# Altium PCB Hub-UV17.PcbDoc
Units mm, origin at the board's own origin, x right, y up, seen from the top; angles counter-clockwise.
Board outline 105 x 70 mm, 4 copper layers (Top Layer, Internal Plane 1, Signal Layer 1, Bottom Layer), stack 0.778 mm thick; 113 components, 152 nets, 765 pads, 115 vias.
Unrouted connection lines stored in the file: 410.
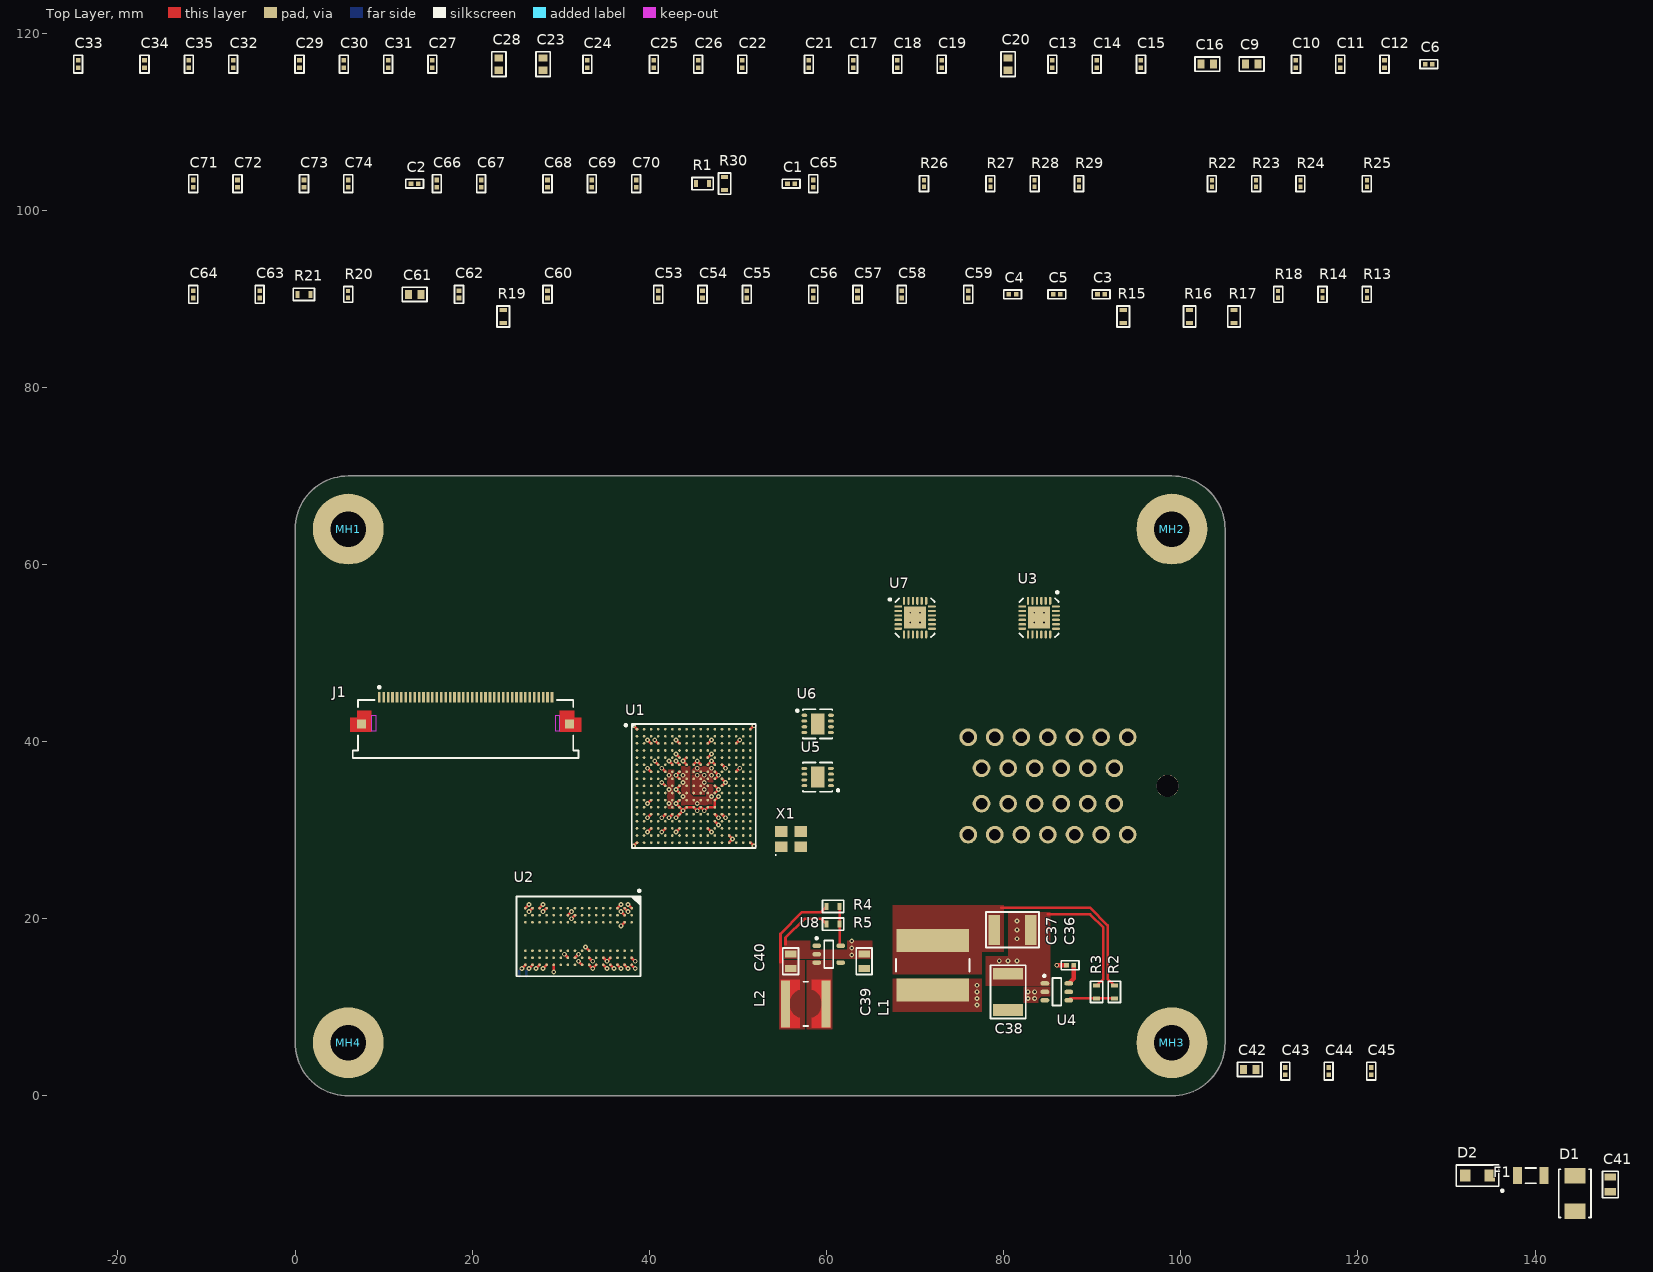
[diagram p0: Top Layer view]
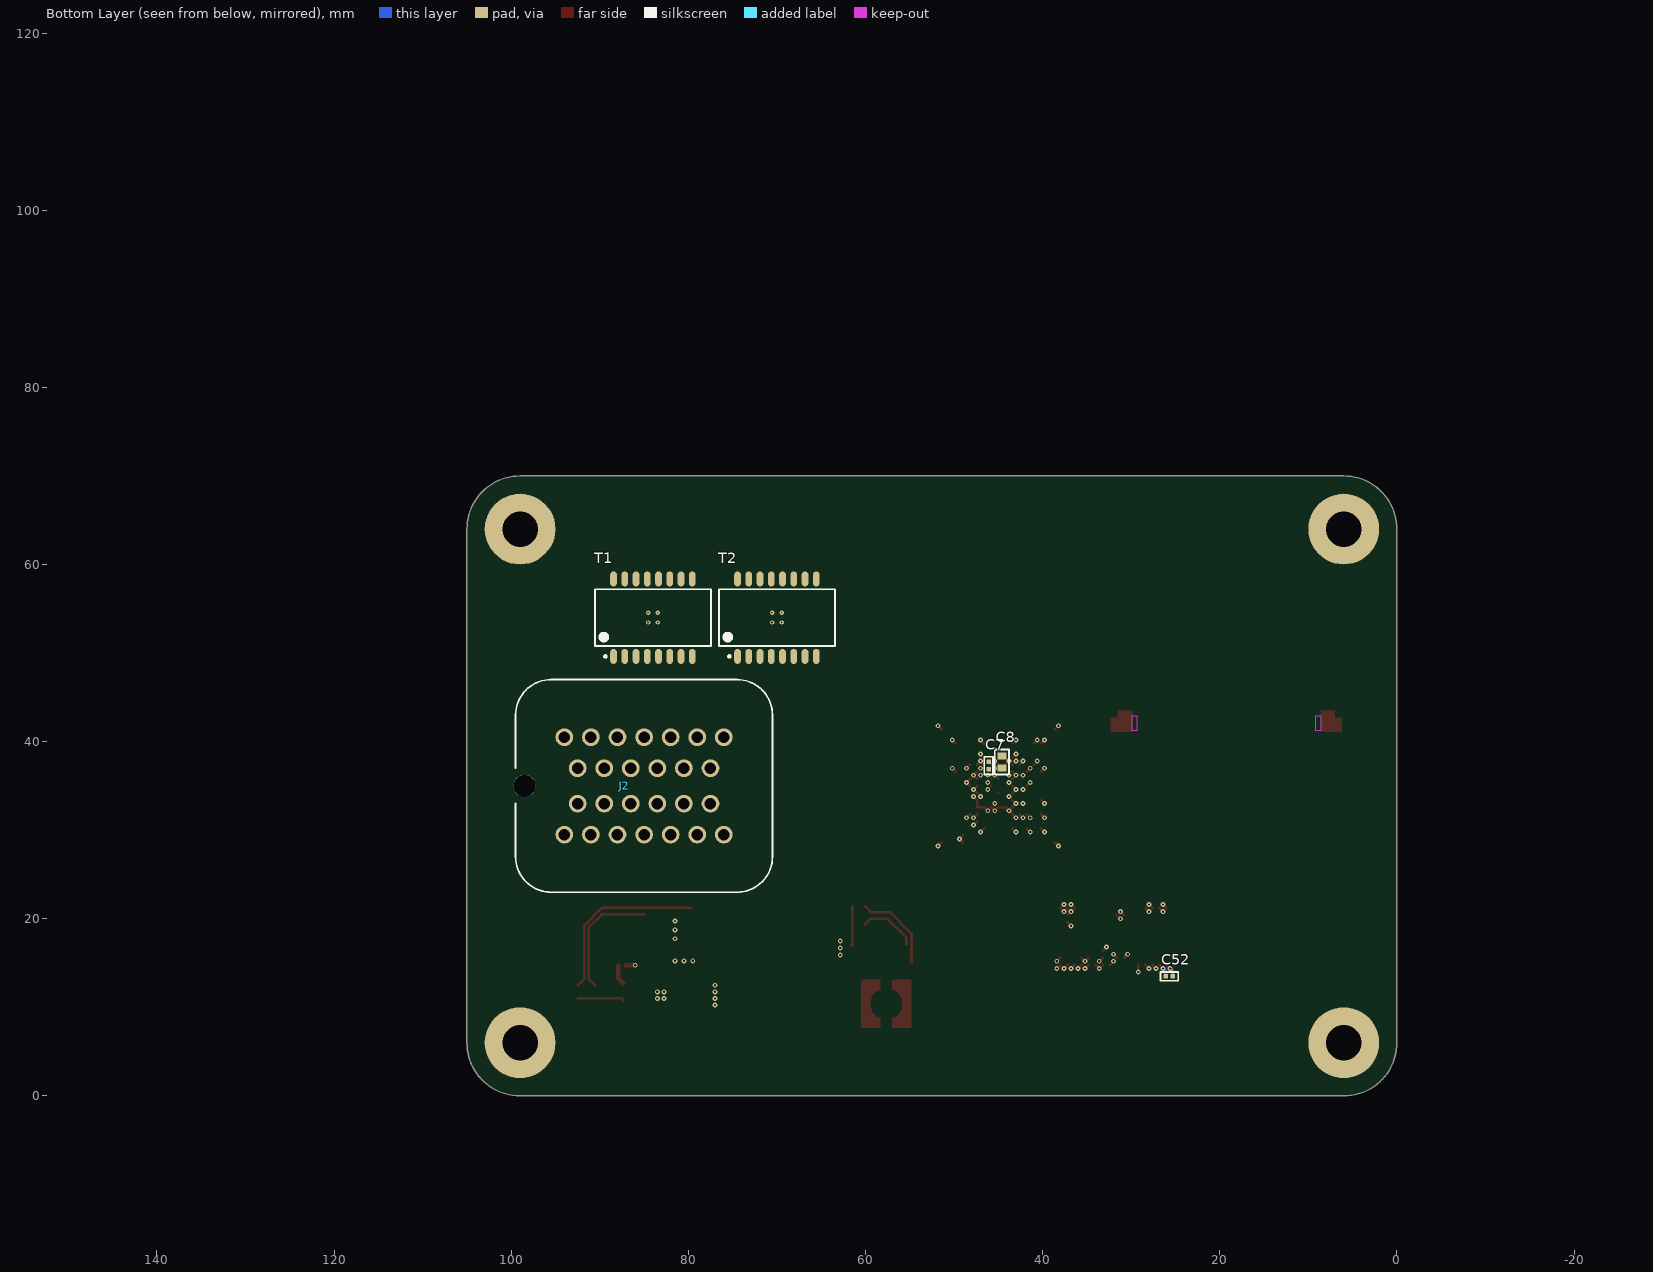
[diagram p1: Bottom Layer view, seen from below]
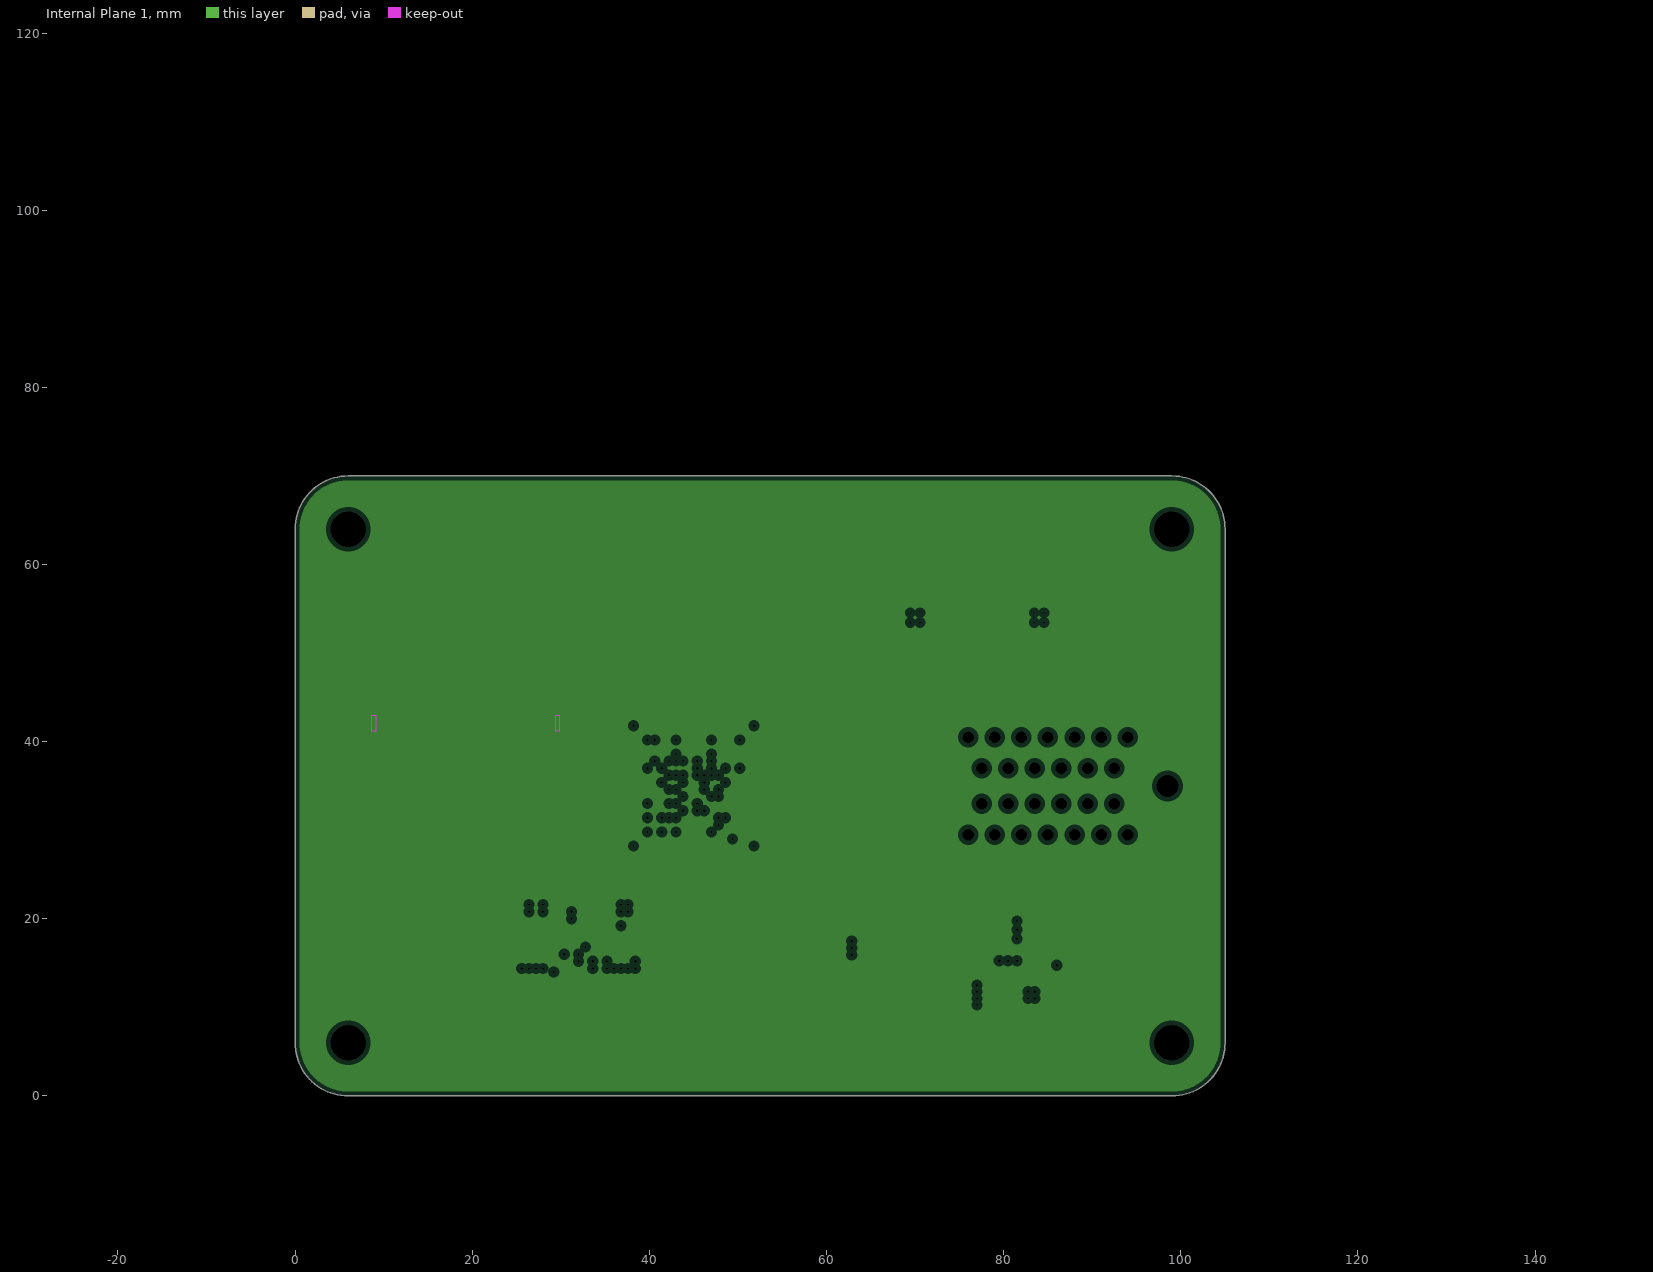
[diagram p2: Internal Plane 1, clearances drawn from the general rule]
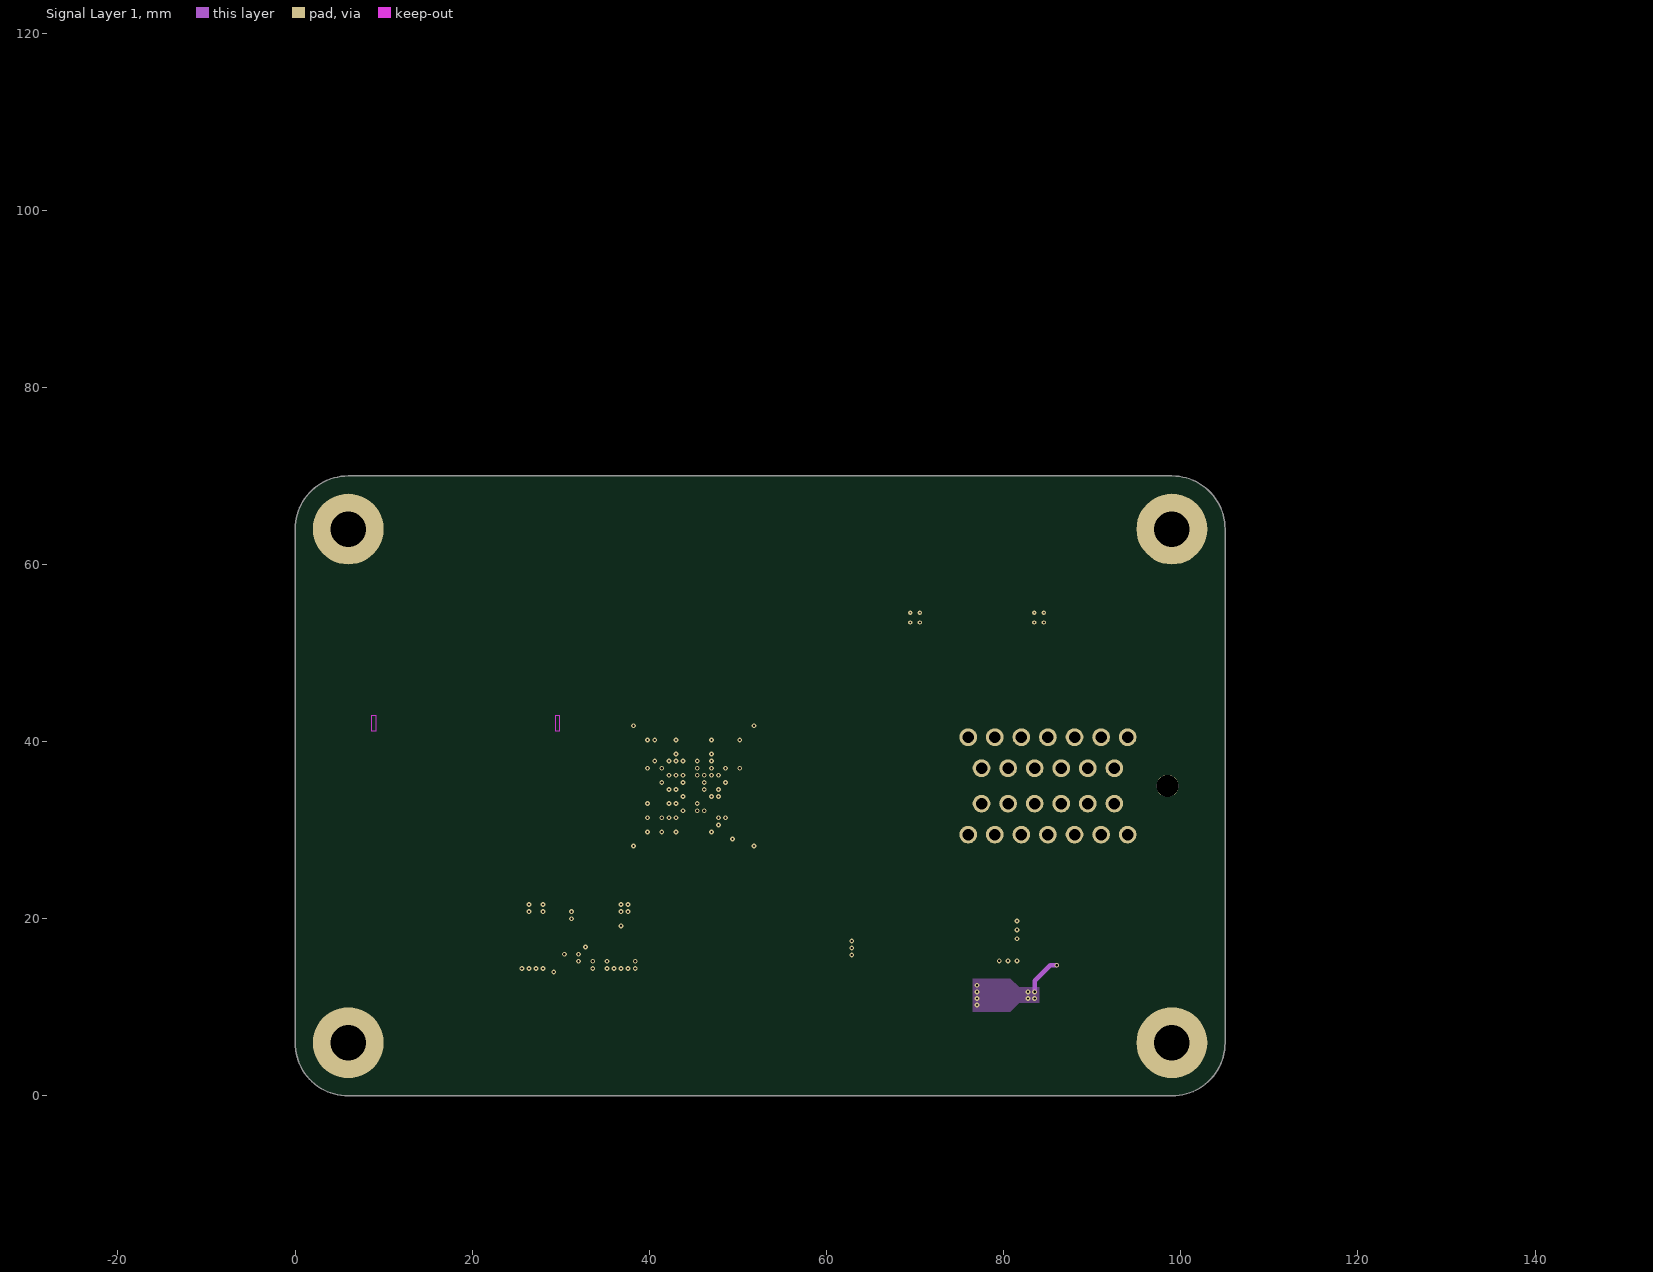
[diagram p3: Signal Layer 1]

## Layer stack, top to bottom
Top Solder: solder mask 0.0102, Solder Resist, Dk 3.5
Top Layer: signal copper 0.0356
Dielectric 1: core 0.254, FR-4, Dk 4.2
Internal Plane 1: plane copper 0.036
Dielectric 3: core 0.254, Dk 4.2
Signal Layer 1: signal copper 0.036
Dielectric 4: prepreg 0.127, Dk 4.2
Bottom Layer: signal copper 0.0356
Bottom Solder: solder mask 0.0102, Solder Resist, Dk 3.5

## Board outline
0,6 ccw(c6,6) 6,0 99,0 ccw(c99,6) 105,6 105,64 ccw(c99,64) 99,70 6,70 ccw(c6,64) 0,64

## Design rules (kind name [scope] priority, off if disabled: settings)
Clearance "Keep Out Clearance" [All vs OnLayer('Keep-Out Layer')] p1: gap=0 ignorepadtopadclearanceinfootprint=TRUE
Clearance [All] p2: gap=0.127 ignorepadtopadclearanceinfootprint=FALSE
DiffPairsRouting [All] p1: maxlimit=0.254 minlimit=0.254 mostfreqgap=0.254 toplayer_minwidth=0.381 toplayer_maxwidth=0.381 toplayer_prefwidth=0.381 midlayer1_minwidth=0.381 midlayer1_maxwidth=0.381 midlayer1_prefwidth=0.381 bottomlayer_minwidth=0.381 bottomlayer_maxwidth=0.381 bottomlayer_prefwidth=0.381 maxuncoupledlength=12.7
PlaneClearance [All] p1: clearance=0.508
PlaneConnect [All] p1: planeconnectstyle=Relief reliefexpansion=0.508 reliefentries=4 reliefconductorwidth=0.254 reliefairgap=0.254
PolygonConnect PolygonConnect_Power [All] p1: connectstyle=Direct reliefconductorwidth=0.254 reliefentries=4 polygonreliefangle="90 Angle" airgapwidth=0.254
PolygonConnect [All] p2: connectstyle=Relief reliefconductorwidth=0.254 reliefentries=4 polygonreliefangle="90 Angle" airgapwidth=0.254
RoutingVias [All] p1: holewidth=0.711 width=1.27 viastyle="Through Hole" minholewidth=0.25 minwidth=0.55 maxholewidth=0.711 maxwidth=1.27
SolderMaskExpansion [All] p1: expansion=0.102
Width [All] p1: maxlimit=2 minlimit=0.127 preferedwidth=0.2
27 further rules are at their usual default settings.

## Classes and differential pairs
net class ETH_CTRL: ETH_MDC ETH_MDIO ETH_nRST
net class UART: UART_CTS UART_RTS UART_RXD UART_TXD
component class "CPU - Communications": U5 U6
component class "CPU - Control": X1
component class "CPU - DDR3": C3 C4 C5 C42 C43 C44 C45 C52 C53 C54 C55 C56 C57 C58 C59 C60 C61 C62 C63 C64 R13 R14 R15 R16 R17 R18 R19 R20 R21 U1 U2
component class "CPU - Ethernet": C1 C2 C65 C66 C67 C68 C69 C70 C71 C72 C73 C74 R1 R22 R23 R24 R25 R26 R27 R28 R29 R30 T1 T2 U3 U7
component class "CPU - LCD": J1
component class "CPU - Power": C6 C7 C8 C9 C10 C11 C12 C13 C14 C15 C16 C17 C18 C19 C20 C21 C22 C23 C24 C25 C26 C27 C28 C29 C30 C31 C32 C33 C34 C35
component class Power: C36 C37 C38 C39 C40 C41 D1 D2 F1 L1 L2 R2 R3 R4 R5 U4 U8
net class CAN1: CAN1_RX CAN1_TX
net class CAN2: CAN2_RX CAN2_TX
net class DIFF100: DRAM_CLK_N DRAM_CLK_P DRAM_DQS0_N DRAM_DQS0_P DRAM_DQS1_N DRAM_DQS1_P
net class DRAM_ADDRCNTL: DRAM_A0 DRAM_A1 DRAM_A2 DRAM_A3 DRAM_A4 DRAM_A5 DRAM_A6 DRAM_A7 DRAM_A8 DRAM_A9 DRAM_A10 DRAM_A11 DRAM_A12 DRAM_A13 DRAM_A14 DRAM_A15 DRAM_BA0 DRAM_BA1 DRAM_BA2 DRAM_CAS DRAM_CKE0 DRAM_CKE1 DRAM_CS0 DRAM_CS1 DRAM_ODT0 DRAM_ODT1 DRAM_RAS DRAM_RST DRAM_WE
net class DRAM_BANK0: DRAM_D0 DRAM_D1 DRAM_D2 DRAM_D3 DRAM_D4 DRAM_D5 DRAM_D6 DRAM_D7 DRAM_DQM0 DRAM_DQS0_N DRAM_DQS0_P
net class DRAM_BANK1: DRAM_D8 DRAM_D9 DRAM_D10 DRAM_D11 DRAM_D12 DRAM_D13 DRAM_D14 DRAM_D15 DRAM_DQM1 DRAM_DQS1_N DRAM_DQS1_P
net class DRAM_CLK: DRAM_CLK_N DRAM_CLK_P
net class ETH1_RMII: ETH1_RMII_CRS_DV ETH1_RMII_REF_CLK ETH1_RMII_RX_ER ETH1_RMII_RXD0 ETH1_RMII_RXD1 ETH1_RMII_TX_EN ETH1_RMII_TXD0 ETH1_RMII_TXD1
net class ETH2_RMII: ETH2_RMII_CRS_DV ETH2_RMII_REF_CLK ETH2_RMII_RX_ER ETH2_RMII_RXD0 ETH2_RMII_RXD1 ETH2_RMII_TX_EN ETH2_RMII_TXD0 ETH2_RMII_TXD1
net class LCD: LCD_B0 LCD_B1 LCD_B2 LCD_B3 LCD_B4 LCD_B5 LCD_B6 LCD_B7 LCD_CLK LCD_DE LCD_G0 LCD_G1 LCD_G2 LCD_G3 LCD_G4 LCD_G5 LCD_G6 LCD_G7 LCD_HSYNC LCD_R0 LCD_R1 LCD_R2 LCD_R3 LCD_R4 LCD_R5 LCD_R6 LCD_R7 LCD_RESET LCD_VSYNC
component class Mechanical: J2 MH1 MH2 MH3 MH4
differential pair DRAM_CLK: +DRAM_CLK_P -DRAM_CLK_N
differential pair DRAM_DQS0: +DRAM_DQS0_P -DRAM_DQS0_N
differential pair DRAM_DQS1: +DRAM_DQS1_P -DRAM_DQS1_N

## Components (designator, comment, footprint, x,y, rotation, side; value= is the part's Value field where it differs from the comment)
C1 "Capacitor" CAP-0402-M 56,103 r0 top value=0.10µF
C2 "Capacitor" CAP-0402-M 13.5,103 r0 top value=0.10µF
C3 "CAP 0.22µF ±10% 16V 0402 X7R" CAP-0402-M 91,90.5 r0 top value=0.22µF
C4 "CAP 0.22µF ±10% 16V 0402 X7R" CAP-0402-M 81,90.5 r0 top value=0.22µF
C5 "CAP 0.22µF ±10% 16V 0402 X7R" CAP-0402-M 86,90.5 r0 top value=0.22µF
C6 "Capacitor" CAP-0402-M 128,116.5 r0 top value=0.22µF
C7 "Capacitor" CAP-0402-M 46.1,37.3 r270 bottom value=0.22µF
C8 "CAP 22µF ±20% 10V 0603 X5R" CAP-0603-M 44.6,37.7 r270 bottom value=22µF
C9 "CAP 22µF ±20% 10V 0603 X5R" CAP-0603-M 108,116.5 r0 top value=22µF
C10 "Capacitor" CAP-0402-M 113,116.5 r90 top value=4.7µF
C11 "Capacitor" CAP-0402-M 118,116.5 r90 top value=0.22µF
C12 "Capacitor" CAP-0402-M 123,116.5 r90 top value=0.22µF
C13 "Capacitor" CAP-0402-M 85.5,116.5 r90 top value=0.22µF
C14 "Capacitor" CAP-0402-M 90.5,116.5 r90 top value=0.22µF
C15 "Capacitor" CAP-0402-M 95.5,116.5 r90 top value=0.22µF
C16 "CAP 22µF ±20% 10V 0603 X5R" CAP-0603-M 103,116.5 r0 top value=22µF
C17 "Capacitor" CAP-0402-M 63,116.5 r90 top value=4.7µF
C18 "Capacitor" CAP-0402-M 68,116.5 r90 top value=0.22µF
C19 "Capacitor" CAP-0402-M 73,116.5 r90 top value=0.22µF
C20 "CAP 10µF ±20% 6.3V 0603 X5R" CAP-0603-M 80.5,116.5 r90 top value=10µF
C21 "Capacitor" CAP-0402-M 58,116.5 r90 top value=0.22µF
C22 "Capacitor" CAP-0402-M 50.5,116.5 r90 top value=0.22µF
C23 "CAP 22µF ±20% 10V 0603 X5R" CAP-0603-M 28,116.5 r90 top value=22µF
C24 "Capacitor" CAP-0402-M 33,116.5 r90 top value=0.22µF
C25 "Capacitor" CAP-0402-M 40.5,116.5 r90 top value=0.22µF
C26 "Capacitor" CAP-0402-M 45.5,116.5 r90 top value=0.22µF
C27 "Capacitor" CAP-0402-M 15.5,116.5 r90 top value=0.22µF
C28 "CAP 10µF ±20% 6.3V 0603 X5R" CAP-0603-M 23,116.5 r90 top value=10µF
C29 "Capacitor" CAP-0402-M 0.5,116.5 r90 top value=0.22µF
C30 "Capacitor" CAP-0402-M 5.5,116.5 r90 top value=0.22µF
C31 "Capacitor" CAP-0402-M 10.5,116.5 r90 top value=0.22µF
C32 "Capacitor" CAP-0402-M -7,116.5 r90 top value=0.22µF
C33 "Capacitor" CAP-0402-M -24.5,116.5 r90 top value=0.22µF
C34 "Capacitor" CAP-0402-M -17,116.5 r90 top value=0.22µF
C35 "Capacitor" CAP-0402-M -12,116.5 r90 top value=0.22µF
C36 "CAP 0.10µF ±10% 25V 0402 X7R" CAP-0402-M 87.5,14.75 r180 top value=0.10µF
C37 "CAP 47µF ±20% 6.3V 1210 X5R" CAP-1210-M 81,18.75 r180 top value=47µF
C38 "CAP 22µF ±10% 25V 1210 X5R" CAP-1210-M 80.5,11.75 r270 top value=22µF
C39 "CAP 4.7µF ±10% 6.3V 0805 X5R" CAP-0805-M 64.25,15.2 r270 top value=4.7µF
C40 "CAP 10µF ±10% 6.3V 0805 X5R" CAP-0805-M 55.95,15.2 r270 top value=10µF
C41 "CAP 1nF ±10% 250V 0805 X7R" CAP-0805-M 148.5,-10 r270 top value=1nF
C42 "CAP 22µF ±20% 10V 0603 X5R" CAP-0603-M 107.8,3 r0 top value=22µF
C43 "CAP 0.22µF ±10% 16V 0402 X7R" CAP-0402-M 111.8,2.8 r90 top value=0.22µF
C44 "CAP 0.22µF ±10% 16V 0402 X7R" CAP-0402-M 116.7,2.8 r90 top value=0.22µF
C45 "CAP 0.22µF ±10% 16V 0402 X7R" CAP-0402-M 121.5,2.8 r90 top value=0.22µF
C52 "CAP 0.22µF ±10% 16V 0402 X7R" CAP-0402-M 25.7,13.5 r180 bottom value=0.22µF
C53 "CAP 0.22µF ±10% 16V 0402 X7R" CAP-0402-M 41,90.5 r90 top value=0.22µF
C54 "CAP 0.22µF ±10% 16V 0402 X7R" CAP-0402-M 46,90.5 r90 top value=0.22µF
C55 "CAP 0.22µF ±10% 16V 0402 X7R" CAP-0402-M 51,90.5 r90 top value=0.22µF
C56 "CAP 0.22µF ±10% 16V 0402 X7R" CAP-0402-M 58.5,90.5 r90 top value=0.22µF
C57 "CAP 0.22µF ±10% 16V 0402 X7R" CAP-0402-M 63.5,90.5 r90 top value=0.22µF
C58 "CAP 0.22µF ±10% 16V 0402 X7R" CAP-0402-M 68.5,90.5 r90 top value=0.22µF
C59 "CAP 0.22µF ±10% 16V 0402 X7R" CAP-0402-M 76,90.5 r90 top value=0.22µF
C60 "CAP 2.2pF ±0.1pF 50V 0402 C0G, NP0" CAP-0402-M 28.5,90.5 r90 top value=2.2pF
C61 "CAP 4.7µF ±10% 10V 0603 X5R" CAP-0603-M 13.5,90.5 r0 top value=4.7µF
C62 "Capacitor" CAP-0402-M 18.5,90.5 r90 top value=0.10µF
C63 "Capacitor" CAP-0402-M -4,90.5 r90 top value=0.10µF
C64 "CAP 2.2pF ±0.1pF 50V 0402 C0G, NP0" CAP-0402-M -11.5,90.5 r90 top value=2.2pF
C65 "Capacitor" CAP-0402-M 58.5,103 r90 top value=0.10µF
C66 "Capacitor" CAP-0402-M 16,103 r90 top value=0.10µF
C67 "CAP 1µF ±10% 6.3V 0402 X7R" CAP-0402-M 21,103 r90 top value=1µF
C68 "Capacitor" CAP-0402-M 28.5,103 r90 top value=0.10µF
C69 "Capacitor" CAP-0402-M 33.5,103 r90 top value=0.10µF
C70 "CAP 1µF ±10% 6.3V 0402 X7R" CAP-0402-M 38.5,103 r90 top value=1µF
C71 "CAP 1µF ±10% 6.3V 0402 X7R" CAP-0402-M -11.5,103 r90 top value=1µF
C72 "CAP 470pF ±5% 50V 0402 C0G, NP0" CAP-0402-M -6.5,103 r90 top value=470pF
C73 "CAP 1µF ±10% 6.3V 0402 X7R" CAP-0402-M 1,103 r90 top value=1µF
C74 "CAP 470pF ±5% 50V 0402 C0G, NP0" CAP-0402-M 6,103 r90 top value=470pF
D1 "SMAJ30C" SON127P500X135-2N 144.5,-11 r270 top
D2 "BZT52HC30WF-7" SODFL340X115-2N 133.5,-9 r180 top
F1 "0ZCJ0050AF2E" 0ZCJ-1206-0.9 139.5,-9 r180 top value=500mA
J1 "541044013" MOLX-54104-4031 19.25,43.5 r0 top
J2 "6437288-6" 6437288-6 85,35 r0 bottom locked
L1 "SRN8040-2R2Y" INDP8080X40N 72,14.75 r90 top value=2.2uH
L2 "SRR4028-2R2Y" INDP4848X28N 57.65,10.4 r180 top value=2.2uH
MH1 "#6-32" MH-6-32#1 1,64 r0 top locked
MH2 "#6-32" MH-6-32#2 99,64 r0 top locked
MH3 "#6-32" MH-6-32#2 99,6 r0 top locked
MH4 "#6-32" MH-6-32#1 1,6 r0 top locked
R1 "Resistor" RES-0603-M 46,103 r0 top value=6K49
R2 "RES 33K2 1% 1/10 W 0603 ±100ppm/°C" RES-0603-M 92.5,11.75 r90 top value=33K2
R3 "RES 10K 1% 1/10 W 0603 ±100ppm/°C" RES-0603-M 90.5,11.75 r270 top value=10K
R4 "RES 150K 1% 1/10 W 0603 ±100ppm/°C" RES-0603-M 60.75,21.4 r180 top value=150K
R5 "RES 120K 1% 1/10 W 0603 ±100ppm/°C" RES-0603-M 60.75,19.4 r0 top value=120K
R13 "RES 240R 1% 1/16W 0402" RES-0402-M 121,90.5 r90 top value=240R
R14 "RES 240R 1% 1/16W 0402" RES-0402-M 116,90.5 r90 top value=240R
R15 "RES 10K 1% 1/10 W 0603 ±100ppm/°C" RES-0603-M 93.5,88 r90 top value=10K
R16 "RES 10K 1% 1/10 W 0603 ±100ppm/°C" RES-0603-M 101,88 r90 top value=10K
R17 "RES 10K 1% 1/10 W 0603 ±100ppm/°C" RES-0603-M 106,88 r90 top value=10K
R18 "RES 240R 1% 1/16W 0402" RES-0402-M 111,90.5 r90 top value=240R
R19 "RES 1K5 1% 1/10 W 0603 ±100ppm/°C" RES-0603-M 23.5,88 r90 top value=1K5
R20 "RES 470R 1% 1/16W 0402" RES-0402-M 6,90.5 r90 top value=470R
R21 "RES 1K5 1% 1/10 W 0603 ±100ppm/°C" RES-0603-M 1,90.5 r0 top value=1K5
R22 "RES 49R9 1% 1/16W 0402" RES-0402-M 103.5,103 r90 top value=49R9
R23 "RES 49R9 1% 1/16W 0402" RES-0402-M 108.5,103 r90 top value=49R9
R24 "RES 49R9 1% 1/16W 0402" RES-0402-M 113.5,103 r90 top value=49R9
R25 "RES 49R9 1% 1/16W 0402" RES-0402-M 121,103 r90 top value=49R9
R26 "RES 49R9 1% 1/16W 0402" RES-0402-M 71,103 r90 top value=49R9
R27 "RES 49R9 1% 1/16W 0402" RES-0402-M 78.5,103 r90 top value=49R9
R28 "RES 49R9 1% 1/16W 0402" RES-0402-M 83.5,103 r90 top value=49R9
R29 "RES 49R9 1% 1/16W 0402" RES-0402-M 88.5,103 r90 top value=49R9
R30 "Resistor" RES-0603-M 48.5,103 r90 top value=6K49
T1 "PT61018AAPEL-S" SOIC127P930X590-16N 84,54 r90 bottom
T2 "PT61018AAPEL-S" SOIC127P930X590-16N 70,54 r90 bottom
U1 "MCIMX6G2AVM05AA" BGA289C80P17X17_1400X1400X132 45,35 r0 top locked
U2 "MT41K256M16" MICT-HA-96 32,18 r270 top locked
U3 "LAN8742AI" QFN50P400X400X100_HS-25N 84,54 r270 top
U4 "TPS563200" TSOP95P280X110-6N 86,11.75 r0 top
U5 "MCP2557FDT-H/MF" QFN65P300X300X90_HS-9N 59,36 r180 top
U6 "MCP2557FDT-H/MF" QFN65P300X300X90_HS-9N 59,42 r0 top
U7 "LAN8742AI" QFN50P400X400X100_HS-25N 70,54 r0 top
U8 "TLV62565" SOT95P280X145-5N 60.25,16 r0 top
X1 "AMB8G" DFN220P320X100-4N 56,29 r0 top value="24 MHz"

## Footprints (in the part's own frame and the unit in brackets; to place one, negate y for a bottom-side part, rotate by r counter-clockwise, add the part's x,y. Pads: shape width x height; smd on the part's side, far side on the other; paste and mask are expansions set on the pad)
0ZCJ-1206-0.9 [mm]
  rect 1x1.9 smd: 1(-1.5,0) 2(1.5,0)
  silkscreen extent -0.6,-0.85 0.6,0.85, body extent -1.75,-0.9 1.75,0.9, height 0.9
6437288-6 [mm]
  round 2 hole 1.3: 1(-9,5.5) 2(-6,5.5) 3(-3,5.5) 4(0,5.5) 5(3,5.5) 6(6,5.5) 7(9,5.5) 8(-7.5,2) 9(-4.5,2) 10(-1.5,2) 11(1.5,2) 12(4.5,2) 13(7.5,2) 14(-7.5,-2) 15(-4.5,-2) 16(-1.5,-2) 17(1.5,-2) 18(4.5,-2) 19(7.5,-2) 20(-9,-5.5) 21(-6,-5.5) 22(-3,-5.5) 23(0,-5.5) 24(3,-5.5) 25(6,-5.5) 26(9,-5.5)
  round 2.5 hole 2.5 unplated: MH1(13.5,0)
  silkscreen extent -14.5,-12 14.5,12, body extent -19.5,-17 19.5,19.5, height 24.6
BGA289C80P17X17_1400X1400X132 [mm] "BGA, 289-Leads, Body 14.00x14.00mmx1.32mm, Pitch 0.80mm"
  round 0.3 smd: A1(-6.4,6.4) A2(-5.6,6.4) A3(-4.8,6.4) A4(-4,6.4) A5(-3.2,6.4) A6(-2.4,6.4) A7(-1.6,6.4) A8(-0.8,6.4) A9(0,6.4) A10(0.8,6.4) A11(1.6,6.4) A12(2.4,6.4) A13(3.2,6.4) A14(4,6.4) A15(4.8,6.4) A16(5.6,6.4) A17(6.4,6.4) B1(-6.4,5.6) B2(-5.6,5.6) B3(-4.8,5.6) B4(-4,5.6) B5(-3.2,5.6) B6(-2.4,5.6) B7(-1.6,5.6) B8(-0.8,5.6) B9(0,5.6) B10(0.8,5.6) B11(1.6,5.6) B12(2.4,5.6) B13(3.2,5.6) B14(4,5.6) B15(4.8,5.6) B16(5.6,5.6) B17(6.4,5.6) C1(-6.4,4.8) C2(-5.6,4.8) C3(-4.8,4.8) C4(-4,4.8) C5(-3.2,4.8) C6(-2.4,4.8) C7(-1.6,4.8) C8(-0.8,4.8) C9(0,4.8) C10(0.8,4.8) C11(1.6,4.8) C12(2.4,4.8) C13(3.2,4.8) C14(4,4.8) C15(4.8,4.8) C16(5.6,4.8) C17(6.4,4.8) D1(-6.4,4) D2(-5.6,4) D3(-4.8,4) D4(-4,4) D5(-3.2,4) D6(-2.4,4) D7(-1.6,4) D8(-0.8,4) D9(0,4) D10(0.8,4) D11(1.6,4) D12(2.4,4) D13(3.2,4) D14(4,4) D15(4.8,4) D16(5.6,4) D17(6.4,4) E1(-6.4,3.2) E2(-5.6,3.2) E3(-4.8,3.2) E4(-4,3.2) E5(-3.2,3.2) E6(-2.4,3.2) E7(-1.6,3.2) E8(-0.8,3.2) E9(0,3.2) E10(0.8,3.2) E11(1.6,3.2) E12(2.4,3.2) E13(3.2,3.2) E14(4,3.2) E15(4.8,3.2) E16(5.6,3.2) E17(6.4,3.2) F1(-6.4,2.4) F2(-5.6,2.4) F3(-4.8,2.4) F4(-4,2.4) F5(-3.2,2.4) F6(-2.4,2.4) F7(-1.6,2.4) F8(-0.8,2.4) F9(0,2.4) F10(0.8,2.4) F11(1.6,2.4) F12(2.4,2.4) F13(3.2,2.4) F14(4,2.4) F15(4.8,2.4) F16(5.6,2.4) F17(6.4,2.4) G1(-6.4,1.6) G2(-5.6,1.6) G3(-4.8,1.6) G4(-4,1.6) G5(-3.2,1.6) G6(-2.4,1.6) G7(-1.6,1.6) G8(-0.8,1.6) G9(0,1.6) G10(0.8,1.6) G11(1.6,1.6) G12(2.4,1.6) G13(3.2,1.6) G14(4,1.6) G15(4.8,1.6) G16(5.6,1.6) G17(6.4,1.6) H1(-6.4,0.8) H2(-5.6,0.8) H3(-4.8,0.8) H4(-4,0.8) H5(-3.2,0.8) H6(-2.4,0.8) H7(-1.6,0.8) H8(-0.8,0.8) H9(0,0.8) H10(0.8,0.8) H11(1.6,0.8) H12(2.4,0.8) H13(3.2,0.8) H14(4,0.8) H15(4.8,0.8) H16(5.6,0.8) H17(6.4,0.8) J1(-6.4,0) J2(-5.6,0) J3(-4.8,0) J4(-4,0) J5(-3.2,0) J6(-2.4,0) J7(-1.6,0) J8(-0.8,0) J9(0,0) J10(0.8,0) J11(1.6,0) J12(2.4,0) J13(3.2,0) J14(4,0) J15(4.8,0) J16(5.6,0) J17(6.4,0) K1(-6.4,-0.8) K2(-5.6,-0.8) K3(-4.8,-0.8) K4(-4,-0.8) K5(-3.2,-0.8) K6(-2.4,-0.8) K7(-1.6,-0.8) K8(-0.8,-0.8) K9(0,-0.8) K10(0.8,-0.8) K11(1.6,-0.8) K12(2.4,-0.8) K13(3.2,-0.8) K14(4,-0.8) K15(4.8,-0.8) K16(5.6,-0.8) K17(6.4,-0.8) L1(-6.4,-1.6) L2(-5.6,-1.6) L3(-4.8,-1.6) L4(-4,-1.6) L5(-3.2,-1.6) L6(-2.4,-1.6) L7(-1.6,-1.6) L8(-0.8,-1.6) L9(0,-1.6) L10(0.8,-1.6) L11(1.6,-1.6) L12(2.4,-1.6) L13(3.2,-1.6) L14(4,-1.6) L15(4.8,-1.6) L16(5.6,-1.6) L17(6.4,-1.6) M1(-6.4,-2.4) M2(-5.6,-2.4) M3(-4.8,-2.4) M4(-4,-2.4) M5(-3.2,-2.4) M6(-2.4,-2.4) M7(-1.6,-2.4) M8(-0.8,-2.4) M9(0,-2.4) M10(0.8,-2.4) M11(1.6,-2.4) M12(2.4,-2.4) M13(3.2,-2.4) M14(4,-2.4) M15(4.8,-2.4) M16(5.6,-2.4) M17(6.4,-2.4) N1(-6.4,-3.2) N2(-5.6,-3.2) N3(-4.8,-3.2) N4(-4,-3.2) N5(-3.2,-3.2) N6(-2.4,-3.2) N7(-1.6,-3.2) N8(-0.8,-3.2) N9(0,-3.2) N10(0.8,-3.2) N11(1.6,-3.2) N12(2.4,-3.2) N13(3.2,-3.2) N14(4,-3.2) N15(4.8,-3.2) N16(5.6,-3.2) N17(6.4,-3.2) P1(-6.4,-4) P2(-5.6,-4) P3(-4.8,-4) P4(-4,-4) P5(-3.2,-4) P6(-2.4,-4) P7(-1.6,-4) P8(-0.8,-4) P9(0,-4) P10(0.8,-4) P11(1.6,-4) P12(2.4,-4) P13(3.2,-4) P14(4,-4) P15(4.8,-4) P16(5.6,-4) P17(6.4,-4) R1(-6.4,-4.8) R2(-5.6,-4.8) R3(-4.8,-4.8) R4(-4,-4.8) R5(-3.2,-4.8) R6(-2.4,-4.8) R7(-1.6,-4.8) R8(-0.8,-4.8) R9(0,-4.8) R10(0.8,-4.8) R11(1.6,-4.8) R12(2.4,-4.8) R13(3.2,-4.8) R14(4,-4.8) R15(4.8,-4.8) R16(5.6,-4.8) R17(6.4,-4.8) T1(-6.4,-5.6) T2(-5.6,-5.6) T3(-4.8,-5.6) T4(-4,-5.6) T5(-3.2,-5.6) T6(-2.4,-5.6) T7(-1.6,-5.6) T8(-0.8,-5.6) T9(0,-5.6) T10(0.8,-5.6) T11(1.6,-5.6) T12(2.4,-5.6) T13(3.2,-5.6) T14(4,-5.6) T15(4.8,-5.6) T16(5.6,-5.6) T17(6.4,-5.6) U1(-6.4,-6.4) U2(-5.6,-6.4) U3(-4.8,-6.4) U4(-4,-6.4) U5(-3.2,-6.4) U6(-2.4,-6.4) U7(-1.6,-6.4) U8(-0.8,-6.4) U9(0,-6.4) U10(0.8,-6.4) U11(1.6,-6.4) U12(2.4,-6.4) U13(3.2,-6.4) U14(4,-6.4) U15(4.8,-6.4) U16(5.6,-6.4) U17(6.4,-6.4)
  silkscreen extent -7.77,-7 7,7, body extent -7,-7 7,7, height 1.32
CAP-0402-M [mm] "Chip Capacitor, 2-Leads, Body 1.00x0.50mm, IPC High Density"
  rect 0.52x0.52 smd: 1(-0.41,0) 2(0.41,0)
  silkscreen extent -1,-0.5 1,0.5, body extent -0.53,-0.28 0.53,0.28, height 0.55
CAP-0603-M [mm] "Chip Capacitor, 2-Leads, Body 1.60x0.80mm, IPC Medium Density"
  rect 0.8x1 smd: 1(-0.7,0) 2(0.7,0)
  silkscreen extent -1.4,-0.8 1.4,0.8, body extent -0.87,-0.48 0.87,0.48, height 0.9
CAP-0805-M [mm] "Chip Capacitor, 2-Leads, Body 2.00x1.25mm, IPC High Density"
  rect 0.8x1.3 smd: 1(-0.825,0) 2(0.825,0)
  silkscreen extent -1.5,-0.9 1.5,0.9, body extent -1.05,-0.67 1.05,0.68, height 1.35
CAP-1210-M [mm] "Chip Capacitor, 2-Leads, Body 4.50x3.20mm, IPC Medium Density"
  rect 1.3x3.4 smd: 1(-2.05,0) 2(2.05,0)
  silkscreen extent -3,-2 3,2, body extent -2.35,-1.7 2.35,1.7, height 1.6
DFN220P320X100-4N [mm] "DFN, 4-Leads, Body 2.30x3.20mm, Pitch 2.20mm, IPC Medium Density"
  rect 1.4x1.2 smd: 1(-1.1,-0.85) 2(1.1,-0.85) 3(1.1,0.85) 4(-1.1,0.85)
  silkscreen extent -1.8,-1.85 -1.7,-1.75, body extent -1.65,-1.3 1.65,1.3, height 1
INDP4848X28N [mm] "Precision Wire Wound Inductor, 2-Leads, Body 4.80x4.80mm, IPC Medium Density"
  rect 1x5.3 smd: 1(-2.3,0) 2(2.3,0)
  Top Layer region: 0.7,2.7 0.7,1.6 1.303,1.258 1.696,0.686 1.8,0 1.8,0 1.696,-0.686 1.303,-1.258 0.7,-1.6 0.7,-1.6 0.7,-2.7 2.8,-2.7 2.8,2.7
  Top Layer region: -0.7,2.7 -0.7,1.6 -1.303,1.258 -1.696,0.686 -1.8,0 -1.8,0 -1.696,-0.686 -1.303,-1.258 -0.7,-1.6 -0.7,-1.6 -0.7,-2.7 -2.8,-2.7 -2.8,2.7
  silkscreen extent -0.25,-2.5 0.25,2.5, body extent -2.4,-2.4 2.4,2.4, height 2.8
INDP8080X40N [mm] "Precision Wire Wound Inductor, 2-Leads, Body 8.00x8.00mm, IPC Medium Density"
  rect 2.6x8.2 smd: 1(-2.8,0) 2(2.8,0)
  silkscreen extent -0.7,-4.15 0.7,4.15, body extent -4,-4 4,4, height 4
MH-6-32#1 [mm] "#6-32 mounting hole"
  round 8 hole 4: 1(5,0)
MH-6-32#2 [mm] "#6-32 mounting hole"
  round 8 hole 4: 1(0,0)
MICT-HA-96 [mm] "BGA, 96-Balls, Body 14x9mm, Pitch 0.8mm"
  round 0.3 smd: A1(-3.2,6) A2(-2.4,6) A3(-1.6,6) A7(1.6,6) A8(2.4,6) A9(3.2,6) B1(-3.2,5.2) B2(-2.4,5.2) B3(-1.6,5.2) B7(1.6,5.2) B8(2.4,5.2) B9(3.2,5.2) C1(-3.2,4.4) C2(-2.4,4.4) C3(-1.6,4.4) C7(1.6,4.4) C8(2.4,4.4) C9(3.2,4.4) D1(-3.2,3.6) D2(-2.4,3.6) D3(-1.6,3.6) D7(1.6,3.6) D8(2.4,3.6) D9(3.2,3.6) E1(-3.2,2.8) E2(-2.4,2.8) E3(-1.6,2.8) E7(1.6,2.8) E8(2.4,2.8) E9(3.2,2.8) F1(-3.2,2) F2(-2.4,2) F3(-1.6,2) F7(1.6,2) F8(2.4,2) F9(3.2,2) G1(-3.2,1.2) G2(-2.4,1.2) G3(-1.6,1.2) G7(1.6,1.2) G8(2.4,1.2) G9(3.2,1.2) H1(-3.2,0.4) H2(-2.4,0.4) H3(-1.6,0.4) H7(1.6,0.4) H8(2.4,0.4) H9(3.2,0.4) J1(-3.2,-0.4) J2(-2.4,-0.4) J3(-1.6,-0.4) J7(1.6,-0.4) J8(2.4,-0.4) J9(3.2,-0.4) K1(-3.2,-1.2) K2(-2.4,-1.2) K3(-1.6,-1.2) K7(1.6,-1.2) K8(2.4,-1.2) K9(3.2,-1.2) L1(-3.2,-2) L2(-2.4,-2) L3(-1.6,-2) L7(1.6,-2) L8(2.4,-2) L9(3.2,-2) M1(-3.2,-2.8) M2(-2.4,-2.8) M3(-1.6,-2.8) M7(1.6,-2.8) M8(2.4,-2.8) M9(3.2,-2.8) N1(-3.2,-3.6) N2(-2.4,-3.6) N3(-1.6,-3.6) N7(1.6,-3.6) N8(2.4,-3.6) N9(3.2,-3.6) P1(-3.2,-4.4) P2(-2.4,-4.4) P3(-1.6,-4.4) P7(1.6,-4.4) P8(2.4,-4.4) P9(3.2,-4.4) R1(-3.2,-5.2) R2(-2.4,-5.2) R3(-1.6,-5.2) R7(1.6,-5.2) R8(2.4,-5.2) R9(3.2,-5.2) T1(-3.2,-6) T2(-2.4,-6) T3(-1.6,-6) T7(1.6,-6) T8(2.4,-6) T9(3.2,-6)
  silkscreen extent -5.27,-7 4.5,7, body extent -4.5,-7 4.5,7, height 1.32
MOLX-54104-4031 [mm] "FPC Connector, 40-Leads, Right Angle, Pitch 0.5 mm, Mated Height 2.0 mm, SMT"
  rect 0.3x1.2 smd: 1(-9.75,1.5) 2(-9.25,1.5) 3(-8.75,1.5) 4(-8.25,1.5) 5(-7.75,1.5) 6(-7.25,1.5) 7(-6.75,1.5) 8(-6.25,1.5) 9(-5.75,1.5) 10(-5.25,1.5) 11(-4.75,1.5) 12(-4.25,1.5) 13(-3.75,1.5) 14(-3.25,1.5) 15(-2.75,1.5) 16(-2.25,1.5) 17(-1.75,1.5) 18(-1.25,1.5) 19(-0.75,1.5) 20(-0.25,1.5) 21(0.25,1.5) 22(0.75,1.5) 23(1.25,1.5) 24(1.75,1.5) 25(2.25,1.5) 26(2.75,1.5) 27(3.25,1.5) 28(3.75,1.5) 29(4.25,1.5) 30(4.75,1.5) 31(5.25,1.5) 32(5.75,1.5) 33(6.25,1.5) 34(6.75,1.5) 35(7.25,1.5) 36(7.75,1.5) 37(8.25,1.5) 38(8.75,1.5) 39(9.25,1.5) 40(9.75,1.5)
  rect 1x1 smd: MP1(-11.75,-1.5) MP2(11.75,-1.5)
  Top Layer region: -10.65,0 -12.25,0 -12.25,-0.8 -13.05,-0.8 -13.05,-2.4 -10.65,-2.4
  Top Layer region: 10.65,0 12.25,0 12.25,-0.8 13.05,-0.8 13.05,-2.4 10.65,-2.4
  Keep-Out Layer region: -10.1,-0.55 -10.65,-0.55 -10.65,-2.25 -10.1,-2.25
  Keep-Out Layer region: 10.65,-0.55 10.1,-0.55 10.1,-2.25 10.65,-2.25
  silkscreen extent -12.75,-5.35 12.75,2.77, body extent -12.75,-5.35 12.75,1.8, height 2.06
QFN50P400X400X100_HS-25N [mm] "QFN, 24-Leads, Body 4.00x4.00mm, Pitch 0.50mm, Thermal Pad 2.50x2.50mm, IPC Medium Density"
  oval 0.9x0.25 smd: 1(-1.9,1.25) 2(-1.9,0.75) 3(-1.9,0.25) 4(-1.9,-0.25) 5(-1.9,-0.75) 6(-1.9,-1.25) 13(1.9,-1.25) 14(1.9,-0.75) 15(1.9,-0.25) 16(1.9,0.25) 17(1.9,0.75) 18(1.9,1.25)
  oval 0.25x0.9 smd: 7(-1.25,-1.9) 8(-0.75,-1.9) 9(-0.25,-1.9) 10(0.25,-1.9) 11(0.75,-1.9) 12(1.25,-1.9) 19(1.25,1.9) 20(0.75,1.9) 21(0.25,1.9) 22(-0.25,1.9) 23(-0.75,1.9) 24(-1.25,1.9)
  rect 2.5x2.5 smd: 25(0,0)
  silkscreen extent -2.97,-2.2 2.2,2.2, body extent -2.1,-2.1 2.1,2.1, height 1
QFN65P300X300X90_HS-9N [mm] "QFN, 8-Leads, Body 3.00x3.00mm, Pitch 0.65mm, Thermal Pad 1.55x2.40mm, IPC Medium Density"
  oval 0.65x0.35 smd: 1(-1.5,0.975) 2(-1.5,0.325) 3(-1.5,-0.325) 4(-1.5,-0.975) 5(1.5,-0.975) 6(1.5,-0.325) 7(1.5,0.325) 8(1.5,0.975)
  rect 1.55x2.4 smd: 9(0,0)
  silkscreen extent -2.43,-1.65 1.65,1.65, body extent -1.55,-1.5 1.55,1.5, height 0.9
RES-0402-M [mm] "Chip Resistor, 2-Leads, Body 1.00x0.50mm, IPC High Density"
  rect 0.5x0.45 smd: 1(-0.375,0) 2(0.375,0)
  silkscreen extent -0.9,-0.5 0.9,0.5, body extent -0.53,-0.28 0.53,0.28, height 0.4
RES-0603-M [mm] "Chip Resistor, 2-Leads, Body 1.60x0.80mm, IPC High Density"
  rect 0.45x0.8 smd: 1(-0.725,0) 2(0.725,0)
  silkscreen extent -1.2,-0.7 1.2,0.7, body extent -0.85,-0.45 0.85,0.45, height 0.55
SODFL340X115-2N [mm] "SODFL, 2-Leads, Body 1.75x3.40mm, IPC Medium Density"
  rect 1.2x1.35 smd: 1(-1.4,0) 2(1.4,0)
  silkscreen extent -2.93,-1.2 2.4,1.82, body extent -1.7,-0.9 1.7,0.9, height 1.15
SOIC127P930X590-16N [mm] "SOIC, 16-Leads, Body 12.80x6.90mm, Pitch 1.27mm, IPC Medium Density"
  oval 1.7x0.75 smd: 1(-4.375,4.445) 2(-4.375,3.175) 3(-4.375,1.905) 4(-4.375,0.635) 5(-4.375,-0.635) 6(-4.375,-1.905) 7(-4.375,-3.175) 8(-4.375,-4.445) 9(4.375,-4.445) 10(4.375,-3.175) 11(4.375,-1.905) 12(4.375,-0.635) 13(4.375,0.635) 14(4.375,1.905) 15(4.375,3.175) 16(4.375,4.445)
  silkscreen extent -4.5,-6.55 3.2,6.55, body extent -4.65,-6.55 4.65,6.55, height 5.9
SON127P500X135-2N [mm] "SON, 2-Leads, Body 3.20x5.00mm, Pitch 1.27mm, IPC Medium Density"
  rect 1.75x2.4 smd: 1(-1.995,0) 2(1.995,0)
  silkscreen extent -2.73,-1.83 2.73,1.83, body extent -2.57,-1.67 2.57,1.68, height 1.35
SOT95P280X145-5N [mm] "SOT23, 5-Leads, Body 2.90x2.80mm, Pitch 0.95mm, IPC Medium Density"
  rrect100% 1x0.5 smd: 1(-1.35,0.95) 2(-1.35,0) 3(-1.35,-0.95) 4(1.35,-0.95) 5(1.35,0.95)
  silkscreen extent -1.5,-1.55 0.5,1.92, body extent -1.5,-1.52 1.5,1.53, height 1.45
TSOP95P280X110-6N [mm] "TSOP, 6-Leads, Body 2.90x1.60mm, Pitch 0.95mm, IPC Medium Density"
  oval 1x0.5 smd: 1(-1.35,0.95) 2(-1.35,0) 3(-1.35,-0.95) 4(1.35,-0.95) 5(1.35,0) 6(1.35,0.95)
  silkscreen extent -1.52,-1.55 0.5,1.92, body extent -1.39,-1.55 1.39,1.55, height 1.1

## Part data
C1 C2 C36 C62 C63 C65 C66 C68 C69: library part CC0402KRX7R8BB104, Manufacturer=Yageo, Manufacturer Series=CC, Package=0402, Supplier Part Number 1=311-2077-1-ND, Temperature Coefficient=X7R, Temperature Range="-55°C ~ 125°C", Tolerance=±10%, Voltage=25V, Component Type=Standard, Part Number=CC0402KRX7R8BB104, Supplier 1=Digi-Key
C3 C4 C5 C43 C44 C45 C52 C53 C54 C55 C56 C57 C58 C59: library part CC0402KRX7R7BB224, Manufacturer=Yageo, Manufacturer Series=CC, Package=0402, Supplier Part Number 1=311-1708-1-ND, Temperature Coefficient=X7R, Temperature Range="-55°C ~ 125°C", Tolerance=±10%, Voltage=16V, Component Type=Standard, Part Number=CC0402KRX7R7BB224, Supplier 1=Digi-Key
C6 C7 C11 C12 C13 C14 C15 C18 C19 C21 C22 C24 C25 C26 C27 C29 C30 C31 C32 C33 C34 C35: library part CC0402KRX5R5BB224, Manufacturer=Yageo, Manufacturer Series=CC, Package=0402, Supplier Part Number 1=311-1681-1-ND, Temperature Coefficient=X5R, Temperature Range="-55°C ~ 85°C", Tolerance=±10%, Voltage=6.3V, Component Type=Standard, Part Number=CC0402KRX5R5BB224, Supplier 1=Digi-Key
C8 C9 C16 C23 C42: library part CC0603MRX5R6BB226, Manufacturer=Yageo, Manufacturer Series=CC, Package=0603, Supplier Part Number 1=311-1819-1-ND, Temperature Coefficient=X5R, Temperature Range="-55°C ~ 85°C", Tolerance=±20%, Voltage=10V, Component Type=Standard, Part Number=CC0603MRX5R6BB226, Supplier 1=Digi-Key
C10 C17: library part CC0402MRX5R5BB475, Manufacturer=Murata, Manufacturer Series=GRM, Package=0402, Supplier Part Number 1=311-1730-1-ND, Temperature Coefficient=X5R, Temperature Range="-55°C ~ 85°C", Tolerance=±20%, Voltage=6.3V, Component Type=Standard, Part Number=CC0402MRX5R5BB475, Supplier 1=Digi-Key
C20 C28: library part CC0603MRX5R5BB106, Manufacturer=Yageo, Manufacturer Series=CC, Package=0603, Supplier Part Number 1=311-1448-1-ND, Temperature Coefficient=X5R, Temperature Range="-55°C ~ 85°C", Tolerance=±20%, Voltage=6.3V, Component Type=Standard, Part Number=CC0603MRX5R5BB106, Supplier 1=Digi-Key
C37: library part CC1210MKX5R5BB476, Manufacturer=Yageo, Manufacturer Series=CC, Package=1210, Supplier Part Number 1=311-2047-1-ND, Temperature Coefficient=X5R, Temperature Range="-55°C ~ 85°C", Tolerance=±20%, Voltage=6.3V, Component Type=Standard, Part Number=CC1210MKX5R5BB476, Supplier 1=Digi-Key
C38: library part CC1210KKX5R8BB226, Manufacturer=Yageo, Manufacturer Series=CC, Package=1210, Supplier Part Number 1=311-2021-1-ND, Temperature Coefficient=X5R, Temperature Range="-55°C ~ 85°C", Tolerance=±10%, Voltage=25V, Component Type=Standard, Part Number=CC1210KKX5R8BB226, Supplier 1=Digi-Key
C39: library part CC0805KKX5R5BB475, Manufacturer=Yageo, Manufacturer Series=CC, Package=0805, Supplier Part Number 1=311-1861-1-ND, Temperature Coefficient=X5R, Temperature Range="-55°C ~ 85°C", Tolerance=±10%, Voltage=6.3V, Component Type=Standard, Part Number=CC0805KKX5R5BB475, Supplier 1=Digi-Key
C40: library part CC0805KKX5R5BB106, Manufacturer=Yageo, Manufacturer Series=CC, Package=0805, Supplier Part Number 1=311-1459-1-ND, Temperature Coefficient=X5R, Temperature Range="-55°C ~ 85°C", Tolerance=±10%, Voltage=6.3V, Component Type=Standard, Part Number=CC0805KKX5R5BB106, Supplier 1=Digi-Key
C41: library part CC0805KRX7RYBB102, Manufacturer=Yageo, Manufacturer Series=CC, Package=0805, Supplier Part Number 1=311-1470-1-ND, Temperature Coefficient=X7R, Temperature Range="-55°C ~ 125°C", Tolerance=±10%, Voltage=250V, Component Type=Standard, Part Number=CC0805KRX7RYBB102, Supplier 1=Digi-Key
C60 C64: library part CC0402BRNPO9BN2R2, Manufacturer=Yageo, Manufacturer Series=CC, Package=0402, Supplier Part Number 1=311-1618-1-ND, Temperature Coefficient="C0G, NP0", Temperature Range="-55°C ~ 125°C", Tolerance=±0.1pF, Voltage=50V, Component Type=Standard, Part Number=CC0402BRNPO9BN2R2, Supplier 1=Digi-Key
C61: library part CC0603KRX5R6BB475, Manufacturer=Yageo, Manufacturer Series=CC, Package=0603, Supplier Part Number 1=311-1455-1-ND, Temperature Coefficient=X5R, Temperature Range="-55°C ~ 85°C", Tolerance=±10%, Voltage=10V, Component Type=Standard, Part Number=CC0603KRX5R6BB475, Supplier 1=Digi-Key
C67 C70 C71 C73: library part CC0402KRX7R5BB105, Manufacturer=Yageo, Manufacturer Series=CC, Package=0402, Supplier Part Number 1=311-1702-1-ND, Temperature Coefficient=X7R, Temperature Range="-55°C ~ 125°C", Tolerance=±10%, Voltage=6.3V, Component Type=Standard, Part Number=CC0402KRX7R5BB105, Supplier 1=Digi-Key
C72 C74: library part CC0402JRNPO9BN471, Manufacturer=Yageo, Manufacturer Series=CC, Package=0402, Supplier Part Number 1=311-1671-1-ND, Temperature Coefficient="C0G, NP0", Temperature Range="-55°C ~ 125°C", Tolerance=±5%, Voltage=50V, Component Type=Standard, Part Number=CC0402JRNPO9BN471, Supplier 1=Digi-Key
D2: Supplier Part Number 1=BZT52HC30WF-7DICT-ND, Supplier 1=Digi-Key
J1: library part MOLX-54104-4031
J2: "Superseal 26-way vertical PCB header"
MH1 MH2 MH3 MH4: library part MH-6-32
R1 R30: library part RC0603FR-076K49L, Manufacturer=Yageo, Manufacturer Series=RC, Package=0603, Power="1/10 W", Supplier Part Number 1=311-6.49KHRCT-ND, Temperature Coefficient=±100ppm/°C, Temperature Range="-55°C ~ 155°C", Tolerance=1%, Component Type=Standard, Part Number=RC0603FR-076K49L, Supplier 1=Digi-Key
R2: library part RC0603FR-0733K2L, Manufacturer=Yageo, Manufacturer Series=RC, Package=0603, Power="1/10 W", Supplier Part Number 1=311-33.2KHRCT-ND, Temperature Coefficient=±100ppm/°C, Temperature Range="-55°C ~ 155°C", Tolerance=1%, Component Type=Standard, Part Number=RC0603FR-0733K2L, Supplier 1=Digi-Key
R3 R15 R16 R17: library part RC0603FR-0710KL, Manufacturer=Yageo, Manufacturer Series=RC, Package=0603, Power="1/10 W", Supplier Part Number 1=311-10.0KHRCT-ND, Temperature Coefficient=±100ppm/°C, Temperature Range="-55°C ~ 155°C", Tolerance=1%, Component Type=Standard, Part Number=RC0603FR-0710KL, Supplier 1=Digi-Key
R4: library part RC0603FR-07150KL, Manufacturer=Yageo, Manufacturer Series=RC, Package=0603, Power="1/10 W", Supplier Part Number 1=311-150KHRCT-ND, Temperature Coefficient=±100ppm/°C, Temperature Range="-55°C ~ 155°C", Tolerance=1%, Component Type=Standard, Part Number=RC0603FR-07150KL, Supplier 1=Digi-Key
R5: library part RC0603FR-07120KL, Manufacturer=Yageo, Manufacturer Series=RC, Package=0603, Power="1/10 W", Supplier Part Number 1=311-120KHRCT-ND, Temperature Coefficient=±100ppm/°C, Temperature Range="-55°C ~ 155°C", Tolerance=1%, Component Type=Standard, Part Number=RC0603FR-07120KL, Supplier 1=Digi-Key
R13 R14 R18: library part RC0402FR-07240RL, Manufacturer=Yageo, Manufacturer Series=RC, Package=0402, Power=1/16W, Supplier Part Number 1=311-240LRCT-ND, Temperature Range="-55°C ~ 155°C", Tolerance=1%, Component Type=Standard, Part Number=RC0402FR-07240RL, Supplier 1=Digi-Key
R19 R21: library part RC0603FR-071K5L, Manufacturer=Yageo, Manufacturer Series=RC, Package=0603, Power="1/10 W", Supplier Part Number 1=311-1.50KHRCT-ND, Temperature Coefficient=±100ppm/°C, Temperature Range="-55°C ~ 155°C", Tolerance=1%, Component Type=Standard, Part Number=RC0603FR-071K5L, Supplier 1=Digi-Key
R20: library part RC0402FR-07470RL, Manufacturer=Yageo, Manufacturer Series=RC, Package=0402, Power=1/16W, Supplier Part Number 1=311-470LRCT-ND, Temperature Range="-55°C ~ 155°C", Tolerance=1%, Component Type=Standard, Part Number=RC0402FR-07470RL, Supplier 1=Digi-Key
R22 R23 R24 R25 R26 R27 R28 R29: library part RC0402FR-0749R9L, Manufacturer=Yageo, Manufacturer Series=RC, Package=0402, Power=1/16W, Supplier Part Number 1=311-49.9LRCT-ND, Temperature Range="-55°C ~ 155°C", Tolerance=1%, Component Type=Standard, Part Number=RC0402FR-0749R9L, Supplier 1=Digi-Key
U4: "4.5-V To 17-V Input, 2-A, 3-A Synchronous Step-Down Voltage Regulator In  6 Pin SOT-23"
U5 U6: "CAN transceiver", Supplier Part Number 1=MCP2557FDT-H/MFCT-ND, Supplier 1=Digi-Key
U8: "x 1.5-A High Efficiency Step-Down Converters in SOT-23 5-Pin Package"
X1: library part ABM8G-24.000MHZ-18-D2Y-T

## Via types
v1: diameter 0.55, hole 0.25, Top Layer to Bottom Layer, tented both sides, 107 vias
v2: diameter 0.5, hole 0.2, Top Layer to Bottom Layer, 8 vias

## Nets (pads, with @x,y where several pads share a name; then routed paths per layer and width w, separated by ;. In a path a pad name is that pad's centre, name@x,y a point inside that pad or via, vN(x,y) a via of type N, cw(c..) or ccw(c..) an arc to the next point about the centre after c; other vN are vias at no path point)
+1V35: C9.2 C10.2 C11.2 C12.2 C23.2 C24.2 C25.2 C26.2 C40.2 C42.2 C43.1 C44.1 C45.1 C52.1 C53.1 C54.1 C55.1 C56.1 C57.1 C58.1 C59.1 C61.2 C62.2 L2.2 R4.2 R19.2 U1.G6 U1.H6 U1.H9 U1.H10 U1.J6 U1.J9 U1.J10 U1.K6 U1.K9 U1.K10 U1.L6 U1.M6 U2.A1 U2.A8 U2.B2 U2.C1 U2.C9 U2.D2 U2.D9 U2.E9 U2.F1 U2.G7 U2.H2 U2.H9 U2.K2 U2.K8 U2.N1 U2.N9 U2.R1 U2.R9 | length 19.2
  Top Layer w0.3: v1(26.4,14.4) U2.R9 ; v1(26.4,20.8) U2.R1 ; v1(28,14.4) U2.N9 ; v1(28,20.8) U2.N1 ; v1(30.4,16) U2.K8 ; U2.K2 v1(31.2,20.8) ; v1(32,15.2) U2.H9 ; v1(32.8,16.8) U2.G7 ; U2.E9 v1(35.2,14.4) ; U2.D9 v1(36,14.4) ; U2.C9 v1(36.8,14.4) ; U2.C1 v1(36.8,21.6) ; v1(36.8,20.8) U2.B2 ; v1(37.6,21.6) U2.A1 ; U2.A8 v1(38.4,15.2) ; 54.8,15.1 54.8,18.3 57.25,20.75 59.375,20.75 R4.2
  Bottom Layer w0.3: C52.1 26.11,14.11 v1(26.4,14.4)
  other v1: 42.2,33 42.2,34.6 46.2,34.6 46.2,35.4 42.2,36.2 45.4,36.2 46.2,36.2
+3V3: C1.2 C17.2 C18.2 C29.2 C30.2 C31.2 C33.2 C34.2 C35.2 C37.2 C39.2 C65.2 J1.4 L1.2 R2.2 U1.C4 U1.E7 U1.E13 U1.F4 U1.F13 U1.H13 U1.J13 U1.N13 U3.9 U5.3 U6.3 U7.9 U8.1 U8.4 | length 23.9
  Top Layer w0.3: v1(40.6,37.8) U1.F4 ; v1(40.6,40.2) U1.C4 ; v1(43,38.6) U1.E7 ; U1.N13 v1(48.6,31.4) ; U1.J13 v1(48.6,35.4) U1.H13 ; U1.F13 v1(48.6,37) ; 79.75,21.25 89.75,21.25 91.75,19.25 91.75,13.225 R2.2
+3V3_ETH_A: C2.2 C66.2 C67.2 C68.2 C69.2 C70.2 R22.2 R23.2 R24.2 R25.2 R26.2 R27.2 R28.2 R29.2 U3.1 U3.19 U7.1 U7.19
+NVCC_PLL: C27.2 C28.2 U1.P13
+VBAT: C41.1 D1.1 F1.1
+VBAT_PROT: C38.2 D2.1 F1.2 U4.3 U4.5
+VDD_ARM_CAP: C6.2 C7.2 C8.2 U1.G9 U1.G10 U1.G11 U1.H11
  other v1: 47,36.2 45.4,37 47,37
+VDD_HIGH_CAP: C19.2 C20.2 C32.2 U1.N6 U1.R14 U1.R15 | length 0.6
  Top Layer w0.3: v1(42.2,31.4) U1.N6
+VDD_SNVS_CAP: C22.2 U1.N12 | length 0.6
  Top Layer w0.3: U1.N12 v1(47.8,31.4)
+VDD_SOC_CAP: C13.2 C14.2 C15.2 C16.2 U1.G8 U1.H8 U1.J8 U1.J11 U1.K8 U1.K11 U1.L8 U1.L9 U1.L10 U1.L11
  other v1: 45.4,33 43.8,33.8 47,33.8 43.8,35.4 43.8,36.2
+VREF_DRAM: C3.1 C4.1 C5.1 C62.1 C63.2 R19.1 R21.2 U1.P4 U2.H1 U2.M8
CAN1_H: U5.7
CAN1_L: U5.6
CAN1_RX: U1.G14 U5.4
CAN1_TX: U1.H15 U5.1
CAN2_H: U6.7
CAN2_L: U6.6
CAN2_RX: U1.H14 U6.4
CAN2_TX: U1.J15 U6.1
DRAM_A0: U1.L5 U2.N3
DRAM_A1: U1.H2 U2.P7
DRAM_A2: U1.K1 U2.P3
DRAM_A3: U1.M2 U2.N2
DRAM_A4: U1.K4 U2.P8
DRAM_A5: U1.L1 U2.P2
DRAM_A6: U1.G2 U2.R8
DRAM_A7: U1.H4 U2.R2
DRAM_A8: U1.J4 U2.T8
DRAM_A9: U1.L2 U2.R3
DRAM_A10: U1.M4 U2.L7
DRAM_A11: U1.K3 U2.R7
DRAM_A12: U1.L4 U2.N7
DRAM_A13: U1.H3 U2.T3
DRAM_A14: U1.G1 U2.T7
DRAM_A15: U1.K5 U2.M7
DRAM_BA0: U1.M1 U2.M2
DRAM_BA1: U1.H1 U2.N8
DRAM_BA2: U1.K2 U2.M3
DRAM_CAS: U1.J2 U2.K3
DRAM_CKE0: R15.2 U1.M3 U2.K9
DRAM_CKE1: R16.2 U1.J3 U2.J9
DRAM_CLK_N: R20.1 U1.P2 U2.K7
DRAM_CLK_P: R20.2 U1.P1 U2.J7
DRAM_CS0: U1.N2 U2.L2
DRAM_CS1: U1.H5 U2.L1
DRAM_D0: U1.T4 U2.E3
DRAM_D1: U1.U6 U2.F7
DRAM_D2: U1.T6 U2.F2
DRAM_D3: U1.U7 U2.F8
DRAM_D4: U1.U8 U2.H3
DRAM_D5: U1.T8 U2.H8
DRAM_D6: U1.T5 U2.G2
DRAM_D7: U1.U4 U2.H7
DRAM_D8: U1.U2 U2.D7
DRAM_D9: U1.U3 U2.C3
DRAM_D10: U1.U5 U2.C8
DRAM_D11: U1.R4 U2.C2
DRAM_D12: U1.P5 U2.A7
DRAM_D13: U1.P3 U2.A2
DRAM_D14: U1.R2 U2.B8
DRAM_D15: U1.R1 U2.A3
DRAM_DQM0: U1.T7 U2.E7
DRAM_DQM1: U1.T3 U2.D3
DRAM_DQS0_N: C60.2 U1.P7 U2.G3
DRAM_DQS0_P: C60.1 U1.P6 U2.F3
DRAM_DQS1_N: C64.2 U1.T2 U2.B7
DRAM_DQS1_P: C64.1 U1.T1 U2.C7
DRAM_ODT0: U1.N1 U2.K1
DRAM_ODT1: U1.F1 U2.J1
DRAM_RAS: U1.M5 U2.J3
DRAM_RST: R17.2 U1.G4 U2.T2
DRAM_WE: U1.J1 U2.L3
DRAM_ZQ0: R13.2 U2.L8
DRAM_ZQ1: R14.2 U2.L9
ETH1_RMII_CRS_DV: U1.E16 U3.11
ETH1_RMII_REF_CLK: U1.F14 U3.5
ETH1_RMII_RX_ER: U1.D15 U3.10
ETH1_RMII_RXD0: U1.F16 U3.8
ETH1_RMII_RXD1: U1.E17 U3.7
ETH1_RMII_TX_EN: U1.F15 U3.16
ETH1_RMII_TXD0: U1.E15 U3.17
ETH1_RMII_TXD1: U1.E14 U3.18
ETH1_RX_N: R25.1 T1.9 U3.22
ETH1_RX_P: R24.1 T1.11 U3.23
ETH1_TX_N: R23.1 T1.14 U3.20
ETH1_TX_P: R22.1 T1.16 U3.21
ETH2_RMII_CRS_DV: U1.B17 U7.11
ETH2_RMII_REF_CLK: U1.D17 U7.5
ETH2_RMII_RX_ER: U1.D16 U7.10
ETH2_RMII_RXD0: U1.C17 U7.8
ETH2_RMII_RXD1: U1.C16 U7.7
ETH2_RMII_TX_EN: U1.B15 U7.16
ETH2_RMII_TXD0: U1.A15 U7.17
ETH2_RMII_TXD1: U1.A16 U7.18
ETH2_RX_N: R29.1 T2.9 U7.22
ETH2_RX_P: R28.1 T2.11 U7.23
ETH2_TX_N: R27.1 T2.14 U7.20
ETH2_TX_P: R26.1 T2.16 U7.21
ETH_MDC: U3.13 U7.13
ETH_MDIO: U3.12 U7.12
ETH_nRST: U3.15 U7.15
GND: C1.1 C2.1 C3.2 C4.2 C5.2 C6.1 C7.1 C8.1 C9.1 C10.1 C11.1 C12.1 C13.1 C14.1 C15.1 C16.1 C17.1 C18.1 C21.1 C22.1 C23.1 C24.1 C25.1 C26.1 C27.1 C28.1 C29.1 C30.1 C31.1 C32.1 C33.1 C34.1 C35.1 C37.1 C38.1 C39.1 C40.1 C41.2 C42.1 C43.2 C44.2 C45.2 C52.2 C53.2 C54.2 C55.2 C56.2 C57.2 C58.2 C59.2 C61.1 C63.1 C65.1 C66.1 C67.1 C68.1 C69.1 C70.1 C71.1 C72.1 C73.1 C74.1 D1.2 D2.2 J1.3 J1.29 J1.36 J1.MP1 J1.MP2 MH1.1 MH2.1 MH3.1 MH4.1 R1.1 R3.1 R5.1 R13.1 R14.1 R15.1 R16.1 R17.1 R18.1 R21.1 R30.1 U1.A1 U1.A17 U1.C3 U1.C7 U1.C11 U1.C15 U1.E8 U1.E11 U1.F6 U1.F7 U1.F8 U1.F9 U1.F10 U1.F11 U1.F12 U1.G3 U1.G5 U1.G7 U1.G12 U1.G15 U1.H7 U1.H12 U1.J5 U1.J7 U1.J12 U1.K7 U1.K12 U1.L3 U1.L7 U1.L12 U1.M7 U1.M8 U1.M9 U1.M10 U1.M11 U1.M12 U1.N3 U1.N5 U1.N7 U1.R3 U1.R5 U1.R7 U1.R11 U1.R16 U1.R17 U1.T14 U1.U1 U1.U14 U1.U17 U2.A9 U2.B1 U2.B3 U2.B9 U2.D1 U2.D8 U2.E1 U2.E2 U2.E8 U2.F9 U2.G1 U2.G8 U2.G9 U2.J2 U2.J8 U2.M1 U2.M9 U2.P1 U2.P9 U2.T1 U2.T9 U3.25 U4.1 U5.2 U5.9 U6.2 U6.9 U7.25 U8.2 X1.2 X1.4 | length 60.7
  Top Layer w0.3: v1(25.6,14.4) U2.T9 ; U2.T1 v1(26.4,21.6) ; v1(27.2,14.4) U2.P9 ; U2.P1 v1(28,21.6) ; v1(29.2,14) U2.M9 ; v1(31.2,20) U2.J2 ; U2.J8 v1(32,16) ; U2.G9 v1(33.6,14.4) U2.F9 ; U2.G8 v1(33.6,15.2) ; U2.E8 v1(35.2,15.2) U2.D8 ; v1(36.8,19.2) U2.B3 ; U2.B9 v1(37.6,14.4) ; U2.B1 v1(37.6,20.8) ; U2.A9 v1(38.4,14.4) ; v1(38.2,28.2) U1.U1 ; v1(38.2,41.8) U1.A1 ; v1(39.8,29.8) U1.R3 ; v1(39.8,31.4) U1.N3 ; v1(39.8,33) U1.L3 ; v1(39.8,37) U1.G3 ; v1(39.8,40.2) U1.C3 ; v1(41.4,29.8) U1.R5 ; v1(41.4,31.4) U1.N5 ; v1(41.4,35.4) U1.J5 ; v1(41.4,37) U1.G5 ; v1(42.2,37.8) U1.F6 ; v1(43,29.8) U1.R7 ; v1(43,31.4) U1.N7 v1(43.8,32.2) ; v1(43,37.8) U1.F7 ; v1(43,40.2) U1.C7 ; U1.L7 v1(43,33) U1.M7 v1(43.8,32.2) ; U1.K7 v1(43,34.6) U1.J7 ; U1.H7 v1(43,36.2) U1.G7 ; U1.F8 v1(43.8,37.8) U1.E8 ; U1.F9 v1(45.4,37.8) U1.F10 ; U1.R11 v1(47,29.8) ; U1.F11 v1(47,37.8) U1.F12 ; U1.E11 v1(47,38.6) ; U1.C11 v1(47,40.2) ; U1.K12 v1(47.8,34.6) U1.J12 ; U1.H12 v1(47.8,36.2) U1.G12 ; v1(47.8,33.8) U1.L12 U1.M12 U1.M11 v1(46.2,32.2) U1.M10 v1(45.4,32.2) U1.M9 U1.M8 v1(43.8,32.2) ; U1.U14 v1(49.4,29) U1.T14 ; U1.G15 v1(50.2,37) ; U1.C15 v1(50.2,40.2) ; U1.U17 v1(51.8,28.2) ; U1.A17 v1(51.8,41.8) ; 55.375,17.125 55.375,17.875 57.5,20 59.425,20 R5.1 ; 85,20.5 89.75,20.5 91.25,19 91.25,13.225 R3.1
  Bottom Layer w0.3: C52.2 25.29,14.09 v1(25.6,14.4)
  other v1: 79.5,15.25 80.5,15.25 81.5,15.25 62.85,15.9 62.85,16.7 62.85,17.5 81.5,17.75 81.5,18.75 81.5,19.75
  other v2: 69.45,53.45 70.55,53.45 83.45,53.45 84.55,53.45 69.45,54.55 70.55,54.55 83.45,54.55 84.55,54.55
LCD_B0: J1.21 U1.C13
LCD_B1: J1.22 U1.B13
LCD_B2: J1.23 U1.A13
LCD_B3: J1.24 U1.D14
LCD_B4: J1.25 U1.C14
LCD_B5: J1.26 U1.B14
LCD_B6: J1.27 U1.A14
LCD_B7: J1.28 U1.B16
LCD_BL_ANODE: J1.2
LCD_BL_FB: J1.1
LCD_CLK: J1.30 U1.A8
LCD_DE: J1.34 U1.B8
LCD_DISP: J1.31
LCD_G0: J1.13 U1.B11
LCD_G1: J1.14 U1.A11
LCD_G2: J1.15 U1.E12
LCD_G3: J1.16 U1.D12
LCD_G4: J1.17 U1.C12
LCD_G5: J1.18 U1.B12
LCD_G6: J1.19 U1.A12
LCD_G7: J1.20 U1.D13
LCD_HSYNC: J1.32 U1.D9
LCD_R0: J1.5 U1.B9
LCD_R1: J1.6 U1.A9
LCD_R2: J1.7 U1.E10
LCD_R3: J1.8 U1.D10
LCD_R4: J1.9 U1.C10
LCD_R5: J1.10 U1.B10
LCD_R6: J1.11 U1.A10
LCD_R7: J1.12 U1.D11
LCD_RESET: U1.E9
LCD_VSYNC: J1.33 U1.C9
NetC19_1: C19.1 C20.1
NetC21_2: C21.2 U1.P12 | length 0.6
  Top Layer w0.3: U1.P12 v1(47.8,30.6)
NetC36_1: C36.1 U4.6 | length 2.3
  Top Layer w0.5: U4.6 87.91,13.26 C36.1
NetC71_2: C71.2 C72.2 U3.6
NetC73_2: C73.2 C74.2 U7.6
NetR1_2: R1.2 U3.24
NetR2_1: R2.1 R3.2 U4.4 | length 5.2
  Top Layer w0.3: U4.4 87.575,11.025 R3.2 R2.1
NetR4_1: R4.1 R5.2 U8.5 | length 4.5
  Top Layer w0.3: R4.1 R5.2 61.475,17.075 U8.5
NetR18_2: R18.2 U1.N4
NetR30_2: R30.2 U7.24
NetU1_T16: U1.T16 X1.1
NetU1_T17: U1.T17 X1.3
SW_1V35: L2.1 U8.3
SW_3V3: C36.2 L1.1 U4.2 | length 5.6
  Top Layer w0.5: v1(86,14.75) C36.2
  Signal Layer 1 w0.5: v1(83.5,11.75) 83.5,13 85.25,14.75 v1(86,14.75)
  other v1: 77,10.25 77,11 82.75,11 83.5,11 77,11.75 82.75,11.75 77,12.5
UART_CTS: U1.K15
UART_RTS: U1.J14
UART_RXD: U1.K16
UART_TXD: U1.K14
pads on no net: J1.35 J1.37 J1.38 J1.39 J1.40 J2.1 J2.2 J2.3 J2.4 J2.5 J2.6 J2.7 J2.8 J2.9 J2.10 J2.11 J2.12 J2.13 J2.14 J2.15 J2.16 J2.17 J2.18 J2.19 J2.20 J2.21 J2.22 J2.23 J2.24 J2.25 J2.26 J2.MH1 T1.1 T1.2 T1.3 T1.4 T1.5 T1.6 T1.7 T1.8 T1.10 T1.12 T1.13 T1.15 T2.1 T2.2 T2.3 T2.4 T2.5 T2.6 T2.7 T2.8 T2.10 T2.12 T2.13 T2.15 U1.A2 U1.A3 U1.A4 U1.A5 U1.A6 U1.A7 U1.B1 U1.B2 U1.B3 U1.B4 U1.B5 U1.B6 U1.B7 U1.C1 U1.C2 U1.C5 U1.C6 U1.C8 U1.D1 U1.D2 U1.D3 U1.D4 U1.D5 U1.D6 U1.D7 U1.D8 U1.E1 U1.E2 U1.E3 U1.E4 U1.E5 U1.E6 U1.F2 U1.F3 U1.F5 U1.F17 U1.G13 U1.G16 U1.G17 U1.H16 U1.H17 U1.J16 U1.J17 U1.K13 U1.K17 U1.L13 U1.L14 U1.L15 U1.L16 U1.L17 U1.M13 U1.M14 U1.M15 U1.M16 U1.M17 U1.N8 U1.N9 U1.N10 U1.N11 U1.N14 U1.N15 U1.N16 U1.N17 U1.P8 U1.P9 U1.P10 U1.P11 U1.P14 U1.P15 U1.P16 U1.P17 U1.R6 U1.R8 U1.R9 U1.R10 U1.R12 U1.R13 U1.T9 U1.T10 U1.T11 U1.T12 U1.T13 U1.T15 U1.U9 U1.U10 U1.U11 U1.U12 U1.U13 U1.U15 U1.U16 U3.2 U3.3 U3.4 U3.14 U5.5 U5.8 U6.5 U6.8 U7.2 U7.3 U7.4 U7.14

## Polygon pours and split planes (outlines as drawn)
GND on Top Layer "GND_L01_P020" (solid, pour order 20): 65.15,15.5 65.15,17.5 62.35,17.5 62.35,16.5 58.15,16.5 58.15,17.5 55.2,17.5 55.2,15.5
SW_1V35 on Top Layer "SW_1V35_L01_P022" (solid, pour order 22): 57.75,15.3 57.75,7.5 60.65,7.5 60.65,15.3
SW_3V3 on Top Layer "SW_3V3_L01_P018" (solid, pour order 18): 85.25,12.35 82.25,12.35 82.25,10.5 83.9,10.5 83.9,10.9 84.25,11.25 85.25,11.25
SW_3V3 on Top Layer "SW_3V3_L01_P014" (solid, pour order 14): 67.5,13.25 77.5,13.25 77.5,9.5 67.5,9.5
+3V3 on Top Layer "+3V3_L01_P012" (solid, pour order 12): 80,21.5 80,16.25 77.5,16.25 77.5,13.75 67.5,13.75 67.5,21.5
GND on Top Layer "GND_L01_P010" (solid, pour order 10): 85.25,12.45 78,12.45 78,15.75 80.5,15.75 80.5,20.75 85.25,20.75
+1V35 on Top Layer "+1V35_L01_P034" (solid, pour order 34): 42.8,36.8 42,36.8 42,32.4 42.8,32.4
+VDD_SOC_CAP on Top Layer "+VDD_SOC_CAP_L01_P036" (solid, pour order 36): 47.2,35.2 46.4,35.2 46.4,33.8 45,33.8 44.6,34.2 44.6,37.2 43.6,37.2 43.6,32.8 47.2,32.8
+VDD_ARM_CAP on Top Layer "+VDD_ARM_CAP_L01_P038" (solid, pour order 38): 47.2,35.4 47.2,37.2 45.2,37.2 44.8,36.8 44.8,36.4 46.4,36.4 46.4,35.4
+1V35 on Top Layer "+1V35_L01_P040" (solid, pour order 40): 46.4,36.4 46.4,34 45,34 44.8,34.2 44.8,36.4
+1V35 on Top Layer "+1V35_L01_P024" (solid, pour order 24): 57.55,15.3 57.55,7.5 54.65,7.5 54.65,15.3
SW_3V3 on Signal Layer 1 "SW_3V3_L03_P016" (solid, pour order 16): 76.5,13.25 80.75,13.25 81.75,12.25 84,12.25 84,10.5 81.75,10.5 80.75,9.5 76.5,9.5
no net on Internal Plane 1 (split plane): 99.332,69.482 99.662,69.452 99.99,69.402 100.314,69.332 100.634,69.243 100.947,69.135 101.254,69.008 101.552,68.863 101.841,68.7 102.12,68.52 102.387,68.323 102.642,68.111 102.883,67.883 103.111,67.642 103.323,67.387 103.52,67.12 103.7,66.841 103.863,66.552 104.008,66.254 104.135,65.947 104.243,65.634 104.332,65.314 104.402,64.99 104.452,64.662 104.482,64.332 104.491,64.019 104.49,64 104.49,6 104.491,5.981 104.482,5.668 104.452,5.338 104.402,5.01 104.332,4.686 104.243,4.366 104.135,4.053 104.008,3.746 103.863,3.448 103.7,3.159 103.52,2.88 103.323,2.613 103.111,2.358 102.883,2.117 102.642,1.889 102.387,1.677 102.12,1.48 101.841,1.3 101.552,1.137 101.254,0.992 100.947,0.865 100.634,0.757 100.314,0.668 99.99,0.598 99.662,0.548 99.332,0.518 99.019,0.509 99,0.51 6,0.51 5.981,0.509 5.668,0.518 5.338,0.548 5.01,0.598 4.686,0.668 4.366,0.757 4.053,0.865 3.746,0.992 3.448,1.137 3.159,1.3 2.88,1.48 2.613,1.677 2.358,1.889 2.117,2.117 1.889,2.358 1.677,2.613 1.48,2.88 1.3,3.159 1.137,3.448 0.992,3.746 0.865,4.053 0.757,4.366 0.668,4.686 0.598,5.01 0.548,5.338 0.518,5.668 0.509,5.981 0.51,6 0.51,64 0.509,64.019 0.518,64.332 0.548,64.662 0.598,64.99 0.668,65.314 0.757,65.634 0.865,65.947 0.992,66.254 1.137,66.552 1.3,66.841 1.48,67.12 1.677,67.387 1.889,67.642 2.117,67.883 2.358,68.111 2.613,68.323 2.88,68.52 3.159,68.7 3.448,68.863 3.746,69.008 4.053,69.135 4.366,69.243 4.686,69.332 5.01,69.402 5.338,69.452 5.668,69.482 5.981,69.491 6,69.49 99,69.49 99.019,69.491

## Silkscreen, mask and mechanical layers (free items; w line width, h text height)
Mechanical 1:
  the board outline again, w0.254